# Altium PCB TIDA050024.PcbDoc (part 2 of 3)
Units mil, origin at the board's own origin, x right, y up, seen from the top; angles counter-clockwise.
Board outline 5500.19 x 3301.39 mil, 4 copper layers (Top Layer, Signal Layer 1, Signal Layer 2, Bottom Layer), stack 46.8 mil thick; 150 components, 88 nets, 368 pads, 374 vias.
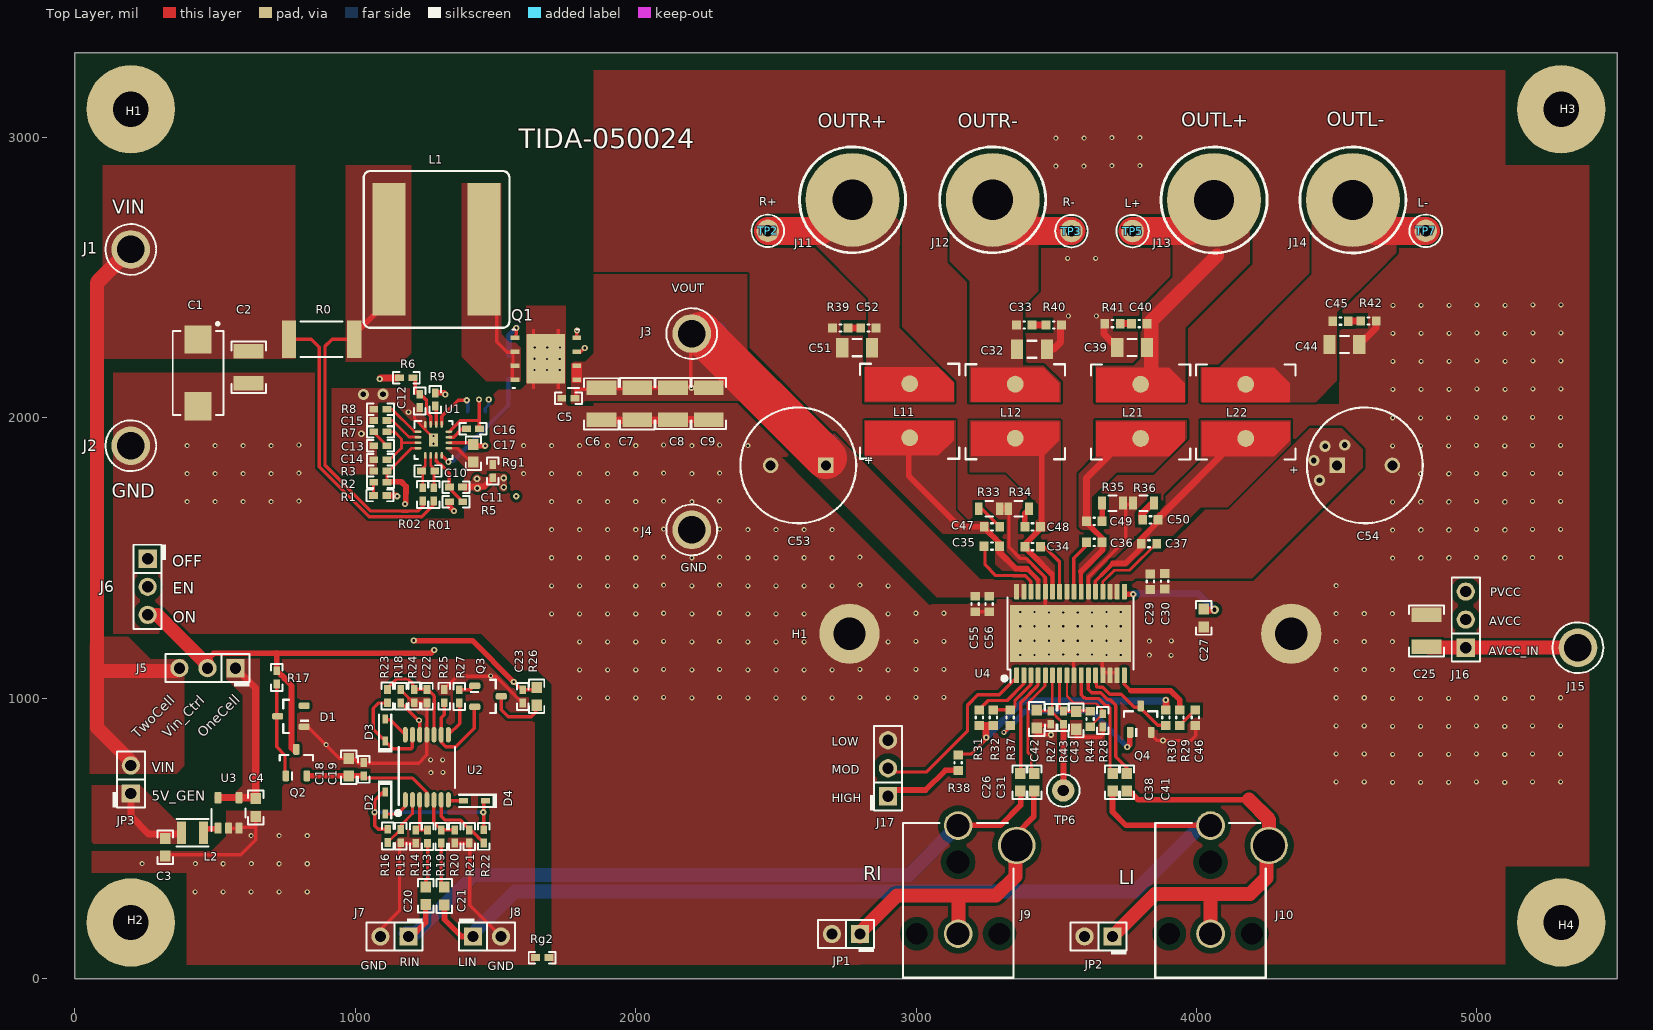
[diagram p0: Top Layer view]

## Part data (continued)
Q1: "MOSFET, 2-CH, N-CH, 30 V, 35 A, DQY0008A (LSON-CLIP-8)", Alternate Manufacturer=None, Manufacturer="Texas Instruments", Supplier Part Number 1=296-28327-6-ND, Value1="0.0088 ohm", Value2="5.9 nC", AEC Category=Q101, AEC Qualified=N, ChType=N, ComponentLink1Description="Datasheet link", ComponentLink1URL=http://www.ti.com/lit/ds/symlink/csd87351q5d.pdf, CompType=MOSFET, IdsMax_A=35, LatestRevisionDate=2017-06-26, LatestRevisionNote="Added parts.", MountType=SMT, PackageReference=DQY0008A, PartNumber=CSD87351Q5D, Published=2008-06-19, Publisher="Texas Instruments", QgTyp_nC=5.9, Rdson45_ohm=0.0088, RoHS=Y, SizeArea_mm2=30, SizeAreaWB_mm2=56, SizeX_mm=6, SizeY_mm=5, SizeZ_mm=1.6, Supplier 1=Digi-Key, Supplier 2=Mouser, Supplier Part Number 2=595-CSD87351Q5D, SymbolCreator=a0799628, SymbolVersion=2016-08-18, U/M=EA, VdsMax_V=30, Vgs_V=10
Q2 Q4: library part "BC850CLT1G, ON Semiconductor", "Transistor, NPN, 45 V, 0.1 A, SOT-23", Manufacturer="ON Semiconductor", Supplier Part Number 1=BC850CLT1GOSCT-ND, Value1="0.1 A", Value2=800, ComponentLink1Description="Datasheet link", ComponentLink1URL=http://www.onsemi.com/pub_link/Collateral/BC846ALT1-D.PDF, CompType=BJT, HfeMax=800, IcRated_A=0.1, LatestRevisionDate=2014-10-24, MountType=SMT, NPN=1, PackageReference=SOT-23, PartNumber=BC850CLT1G, PNP=0, Published=2008-07-31, Publisher="Texas Instruments", RoHS=Y, Supplier 1=Digi-Key, Supplier 2=Farnell, Supplier Part Number 2=1278476, SymbolVersion=2008-07-31, TaMax_C=150, TaMin_C=-55, U/M=EA, Vceo_V=45, Vcesat1_V=0.7
Q3: "MOSFET, N-CH, 50 V, 0.22 A, SOT-23", Alternate Manufacturer=None, Manufacturer="Fairchild Semiconductor", Supplier Part Number 1=BSS138CT-ND, Value1="6 ohm", Value2="1.7 nC", ChType=N, ComponentLink1Description="Datasheet link", ComponentLink1URL=http://www.fairchildsemi.com/ds/BS/BSS138.pdf, CompType=MOSFET, IdsMax_A=0.22, LatestRevisionDate=2015-06-17, LatestRevisionNote="Added parts.", MountType=SMT, PackageReference=SOT-23, PartNumber=BSS138, Published=2008-06-19, Publisher="Texas Instruments", QgTyp_nC=1.7, Rdson45_ohm=6, RoHS=Y, Supplier 1=Digi-Key, Supplier 2=Mouser, Supplier 3=Farnell, Supplier Part Number 2=512-BSS138, Supplier Part Number 3=9845330, SymbolVersion=2008-07-28, U/M=EA, VdsMax_V=50, Vgs_V=20
R0: "RES, 0.002, 1%, 2 W, 2512", Manufacturer="Stackpole Electronics Inc", Power_W=2, Supplier Part Number 1=CSNL2512FT2L00CT-ND, TempCo="50 ppm/C", Tolerance_%=1, Value1=1%, Value2=2W, Value_Code=2L000, ValueDisplayed=0.002, AEC Category=Q200, AEC Qualified=?, ComponentLink1Description="Datasheet link", ComponentLink1URL=http://www.seielect.com/catalog/SEI-CSNL.pdf, CompType=Resistor, LatestRevisionDate=2017-06-26, MountType=SMT, PackageReference=2512, PartNumber=CSNL2512FT2L00, Published=2008-06-26, Publisher="Texas Instruments", Res_ohm=0.002, RoHS=Y, SizeArea_mm2=20.16, SizeX_mm=6.3, SizeY_mm=3.2, SizeZ_mm=0.71, Supplier 1=Digi-Key, SymbolVersion=2009-05-29, Technology="Metal Element", U/M=EA, VDC_V=200
R01 R02 R5 R6: "RES, 10.0, 1%, 0.063 W, 0402", Manufacturer=Vishay-Dale, Power_W=0.063, Supplier Part Number 1=541-10.0LCT-ND, TempCo="100 ppm/C", Tolerance_%=1, Value1=1%, Value2=0.063W, Value_Code=10R0, ValueDisplayed=10.0, AEC Category=Q200, AEC Qualified=?, ComponentLink1Description="Datasheet link", ComponentLink1URL=http://www.vishay.com/docs/20035/dcrcwe3.pdf, CompType=Resistor, EIA_Code=E96, Green_EU RoHS="Passed with Exemption", Green_EU RoHS-2=Passed, Green_Lifecycle=Active, Green_REACh=Passed, LatestRevisionDate=2017-06-12, MountType=SMT, PackageReference=0402, PartNumber=CRCW040210R0FKED, Published=2008-06-26, Publisher="Texas Instruments", Res_ohm=10, RoHS=Y, SizeArea_mm2=0.5, SizeX_mm=1, SizeY_mm=0.5, SizeZ_mm=0.6, Supplier 1=Digi-Key, Supplier 2=Newark, Supplier 3=Mouser, Supplier Part Number 2=52K6600, Supplier Part Number 3=71-CRCW0402-10-E3, SymbolVersion=2009-05-29, Technology="Thick Film", U/M=EA, VDC_V=50
R1: "RES, 49.9, 1%, 0.063 W, 0402", Manufacturer=Vishay-Dale, Power_W=0.063, Supplier Part Number 1=541-49.9LCT-ND, TempCo="100 ppm/C", Tolerance_%=1, Value1=1%, Value2=0.063W, Value_Code=49R9, ValueDisplayed=49.9, AEC Category=Q200, AEC Qualified=?, ComponentLink1Description="Datasheet link", ComponentLink1URL=http://www.vishay.com/docs/20035/dcrcwe3.pdf, CompType=Resistor, EIA_Code=E96, Green_EU RoHS="Passed with Exemption", Green_EU RoHS-2=Passed, Green_Lifecycle=Active, Green_REACh=Passed, LatestRevisionDate=2017-06-12, MountType=SMT, PackageReference=0402, PartNumber=CRCW040249R9FKED, Published=2008-06-26, Publisher="Texas Instruments", Res_ohm=49.9, RoHS=Y, SizeArea_mm2=0.5, SizeX_mm=1, SizeY_mm=0.5, SizeZ_mm=0.6, Supplier 1=Digi-Key, Supplier 2=Newark, Supplier 3=Mouser, Supplier Part Number 2=52K7114, Supplier Part Number 3=71-CRCW0402-49.9-E3, SymbolVersion=2009-05-29, Technology="Thick Film", U/M=EA, VDC_V=50
R2: "RES, 200 k, 1%, 0.1 W, 0402", Manufacturer=Panasonic, Power_W=0.1, Supplier Part Number 1=P200KLCT-ND, TempCo="100 ppm/C", Tolerance_%=1, Value1=1%, Value2=0.1W, Value_Code=200k, AEC Category=Q200, AEC Qualified=?, ComponentLink1Description="Datasheet link", ComponentLink1URL=http://industrial.panasonic.com/www-data/pdf/AOA0000/AOA0000CE2.pdf, CompType=Resistor, EIA_Code=E96, Green_EU RoHS="Passed with Exemption", Green_EU RoHS-2=Incomplete, Green_Lifecycle=Active, Green_REACh=Passed, LatestRevisionDate=2017-06-12, MountType=SMT, PackageReference=0402, PartNumber=ERJ-2RKF2003X, Published=2008-06-26, Publisher="Texas Instruments", Res_ohm=200000, RoHS=Y, SizeArea_mm2=0.5, SizeX_mm=1, SizeY_mm=0.5, SizeZ_mm=0.6, Supplier 1=Digi-Key, Supplier 2=Newark, Supplier 3=Mouser, Supplier Part Number 2=73T6488, Supplier Part Number 3=667-ERJ-2RKF2003X, SymbolVersion=2009-05-29, Technology="Thick Film", U/M=EA, ValueDisplayed=200k, VDC_V=50
R3: "RES, 56.2 k, 1%, 0.063 W, 0402", Manufacturer=Vishay-Dale, Power_W=0.063, Supplier Part Number 1=541-56.2KLCT-ND, TempCo="100 ppm/C", Tolerance_%=1, Value1=1%, Value2=0.063W, Value_Code=56k2, ValueDisplayed=56.2k, AEC Category=Q200, AEC Qualified=?, ComponentLink1Description="Datasheet link", ComponentLink1URL=http://www.vishay.com/docs/20035/dcrcwe3.pdf, CompType=Resistor, EIA_Code=E96, Green_EU RoHS="Passed with Exemption", Green_EU RoHS-2=Passed, Green_Lifecycle=Active, Green_REACh=Passed, LatestRevisionDate=2017-06-12, MountType=SMT, PackageReference=0402, PartNumber=CRCW040256K2FKED, Published=2008-06-26, Publisher="Texas Instruments", Res_ohm=56200, RoHS=Y, SizeArea_mm2=0.5, SizeX_mm=1, SizeY_mm=0.5, SizeZ_mm=0.6, Supplier 1=Digi-Key, Supplier 2=Newark, Supplier 3=Mouser, Supplier Part Number 2=52K7159, Supplier Part Number 3=71-CRCW0402-56.2K-E3, SymbolVersion=2009-05-29, Technology="Thick Film", U/M=EA, VDC_V=50
R7: "RES, 7.50 k, 1%, 0.063 W, 0402", Manufacturer=Vishay-Dale, Power_W=0.063, Supplier Part Number 1=541-7.50KLCT-ND, TempCo="100 ppm/C", Tolerance_%=1, Value1=1%, Value2=0.063W, Value_Code=7k50, ValueDisplayed=7.50k, AEC Category=Q200, AEC Qualified=?, ComponentLink1Description="Datasheet link", ComponentLink1URL=http://www.vishay.com/docs/20035/dcrcwe3.pdf, CompType=Resistor, EIA_Code=E96, Green_EU RoHS="Passed with Exemption", Green_EU RoHS-2=Passed, Green_Lifecycle=Active, Green_REACh=Passed, LatestRevisionDate=2017-06-12, MountType=SMT, PackageReference=0402, PartNumber=CRCW04027K50FKED, Published=2008-06-26, Publisher="Texas Instruments", Res_ohm=7500, RoHS=Y, SizeArea_mm2=0.5, SizeX_mm=1, SizeY_mm=0.5, SizeZ_mm=0.6, Supplier 1=Digi-Key, Supplier 2=Newark, Supplier 3=Mouser, Supplier Part Number 2=52K7245, Supplier Part Number 3=71-CRCW0402-7.5K-E3, SymbolVersion=2009-05-29, Technology="Thick Film", U/M=EA, VDC_V=50
R8: "RES, 137 k, 1%, 0.063 W, 0402", Manufacturer=Vishay-Dale, Power_W=0.063, Supplier Part Number 1=541-137KLCT-ND, TempCo="100 ppm/C", Tolerance_%=1, Value1=1%, Value2=0.063W, Value_Code=137k, AEC Category=Q200, AEC Qualified=?, ComponentLink1Description="Datasheet link", ComponentLink1URL=http://www.vishay.com/docs/20035/dcrcwe3.pdf, CompType=Resistor, EIA_Code=E96, Green_EU RoHS="Passed with Exemption", Green_EU RoHS-2=Passed, Green_Lifecycle=Active, Green_REACh=Passed, LatestRevisionDate=2017-06-12, MountType=SMT, PackageReference=0402, PartNumber=CRCW0402137KFKED, Published=2008-06-26, Publisher="Texas Instruments", Res_ohm=137000, RoHS=Y, SizeArea_mm2=0.5, SizeX_mm=1, SizeY_mm=0.5, SizeZ_mm=0.6, Supplier 1=Digi-Key, Supplier 2=Newark, Supplier 3=Mouser, Supplier Part Number 2=52K6684, Supplier Part Number 3=71-CRCW0402-137K-E3, SymbolVersion=2009-05-29, Technology="Thick Film", U/M=EA, ValueDisplayed=137k, VDC_V=50
R9: "RES, 100 k, 1%, 0.063 W, 0402", Manufacturer=Vishay-Dale, Power_W=0.063, Supplier Part Number 1=541-100KLCT-ND, TempCo="100 ppm/C", Tolerance_%=1, Value1=1%, Value2=0.063W, Value_Code=100k, AEC Category=Q200, AEC Qualified=?, ComponentLink1Description="Datasheet link", ComponentLink1URL=http://www.vishay.com/docs/20035/dcrcwe3.pdf, CompType=Resistor, EIA_Code=E96, Green_EU RoHS="Passed with Exemption", Green_EU RoHS-2=Passed, Green_Lifecycle=Active, Green_REACh=Passed, LatestRevisionDate=2017-06-12, MountType=SMT, PackageReference=0402, PartNumber=CRCW0402100KFKED, Published=2008-06-26, Publisher="Texas Instruments", Res_ohm=100000, RoHS=Y, SizeArea_mm2=0.5, SizeX_mm=1, SizeY_mm=0.5, SizeZ_mm=0.6, Supplier 1=Digi-Key, Supplier 2=Newark, Supplier 3=Mouser, Supplier Part Number 2=52K6607, Supplier Part Number 3=71-CRCW0402-100K-E3, SymbolVersion=2009-05-29, Technology="Thick Film", U/M=EA, ValueDisplayed=100k, VDC_V=50
R10 R11: library part CMP-0081973-1, "RES, 0, 0%, 0.25 W, AEC-Q200 Grade 0, 0603", Manufacturer=Vishay-Dale, Power_W=250mW, Supplier Part Number 1=541-2779-1-ND, Tolerance_%=0%, Value2=0.25W, Value_Code=0, AEC Category=Q200, AEC Grade=0, AEC Qualified=Y, ComponentLink1Description="Datasheet link", ComponentLink1URL=http://www.vishay.com/docs/20065/rcse3.pdf, CompType=Resistor, MountType=SMT, PackageReference=0603, PartNumber=RCS06030000Z0EA, Res_ohm=0, RoHS=Y, SizeArea_mm2=1.28, SizeAreaWB_mm2=4.68, SizeX_mm=1.6, SizeY_mm=0.8, SizeZ_mm=1, Supplier 1=Digi-Key, Supplier 2=Mouser, Supplier Part Number 2=71-RCS06030000Z0EA, Technology="Thick Film", Value1=0%, ValueDisplayed=0
R13 R19 R27 Rg1 Rg2: "RES, 0, 5%, 0.063 W, 0402", Manufacturer=Vishay-Dale, Power_W=0.063, Supplier Part Number 1=541-0.0JCT-ND, TempCo="200 ppm/C", Tolerance_%=5, Value1=5%, Value2=0.063W, Value_Code=0000, ValueDisplayed=0, ComponentLink1Description="Datasheet link", ComponentLink1URL=http://www.vishay.com/docs/20035/dcrcwe3.pdf, CompType=Resistor, EIA_Code=E24, MountType=SMT, PackageReference=0402, PartNumber=CRCW04020000Z0ED, Published=2008-06-26, Publisher="Texas Instruments", Res_ohm=0, RoHS=Y, Supplier 1=Digi-Key, SymbolVersion=2009-05-29, Technology="Thick Film", U/M=EA, VDC_V=50
  R13 R19 R27: LatestRevisionDate=2015-06-17, Supplier 2=Mouser, Supplier 3=Farnell, Supplier Part Number 2=71-CRCW0402-0-E3, Supplier Part Number 3=1469661
  Rg1 Rg2: AEC Category=Q200, AEC Qualified=?, Green_EU RoHS="Passed with Exemption", Green_EU RoHS-2=Passed, Green_Lifecycle=Active, Green_REACh=Passed, LatestRevisionDate=2017-06-12, SizeArea_mm2=0.5, SizeX_mm=1, SizeY_mm=0.5, SizeZ_mm=0.6, Supplier 2=Newark, Supplier 3=Mouser, Supplier Part Number 2=52K6543, Supplier Part Number 3=71-CRCW0402-0-E3
R14 R18 R20: "RES, 100 k, 0.5%, 0.063 W, 0402", Manufacturer=Vishay-Dale, Power_W=0.063, Supplier Part Number 1=541-100KAVCT-ND, TempCo="50 ppm/C", Tolerance_%=0.5, Value1=0.5%, Value2=0.063W, Value_Code=100k, ComponentLink1Description="Datasheet link", ComponentLink1URL=http://www.vishay.com/docs/20036/dcrcwpe3.pdf, CompType=Resistor, EIA_Code=E192, LatestRevisionDate=2015-06-17, MountType=SMT, PackageReference=0402, PartNumber=CRCW0402100KDHEDP, Published=2008-06-26, Publisher="Texas Instruments", Res_ohm=100000, RoHS=Y, Supplier 1=Digi-Key, SymbolVersion=2009-05-29, Technology="Thick Film", U/M=EA, ValueDisplayed=100k, VDC_V=50
R15 R16 R21 R22: "RES, 10.2 k, 1%, 0.063 W, 0402", Manufacturer=Vishay-Dale, Power_W=0.063, Supplier Part Number 1=541-10.2KLCT-ND, TempCo="100 ppm/C", Tolerance_%=1, Value1=1%, Value2=0.063W, Value_Code=10k2, ValueDisplayed=10.2k, ComponentLink1Description="Datasheet link", ComponentLink1URL=http://www.vishay.com/docs/20035/dcrcwe3.pdf, CompType=Resistor, EIA_Code=E96, LatestRevisionDate=2015-06-17, MountType=SMT, PackageReference=0402, PartNumber=CRCW040210K2FKED, Published=2008-06-26, Publisher="Texas Instruments", Res_ohm=10200, RoHS=Y, Supplier 1=Digi-Key, Supplier 2=Mouser, Supplier 3=Farnell, Supplier Part Number 2=71-CRCW0402-10.2K-E3, Supplier Part Number 3=1158295, SymbolVersion=2009-05-29, Technology="Thick Film", U/M=EA, VDC_V=50
R17: "RES, 3.01 k, 1%, 0.063 W, 0402", Manufacturer=Vishay-Dale, Power_W=0.063, Supplier Part Number 1=541-3.01KLCT-ND, TempCo="100 ppm/C", Tolerance_%=1, Value1=1%, Value2=0.063W, Value_Code=3k01, ValueDisplayed=3.01k, AEC Category=Q200, AEC Qualified=?, ComponentLink1Description="Datasheet link", ComponentLink1URL=http://www.vishay.com/docs/20035/dcrcwe3.pdf, CompType=Resistor, EIA_Code=E96, LatestRevisionDate=2017-01-28, MountType=SMT, PackageReference=0402, PartNumber=CRCW04023K01FKED, Published=2008-06-26, Publisher="Texas Instruments", Res_ohm=3010, RoHS=Y, SizeArea_mm2=0.5, SizeX_mm=1, SizeY_mm=0.5, SizeZ_mm=0.6, Supplier 1=Digi-Key, Supplier 2=Newark, Supplier 3=Mouser, Supplier Part Number 2=52K6935, Supplier Part Number 3=71-CRCW0402-3.01K-E3, SymbolVersion=2009-05-29, Technology="Thick Film", U/M=EA, VDC_V=50
R23: "RES, 12.1, 1%, 0.063 W, 0402", Manufacturer=Vishay-Dale, Power_W=0.063, Supplier Part Number 1=541-12.1LCT-ND, TempCo="100 ppm/C", Tolerance_%=1, Value1=1%, Value2=0.063W, Value_Code=12R1, ValueDisplayed=12.1, ComponentLink1Description="Datasheet link", ComponentLink1URL=http://www.vishay.com/docs/20035/dcrcwe3.pdf, CompType=Resistor, EIA_Code=E96, LatestRevisionDate=2015-06-17, MountType=SMT, PackageReference=0402, PartNumber=CRCW040212R1FKED, Published=2008-06-26, Publisher="Texas Instruments", Res_ohm=12.1, RoHS=Y, Supplier 1=Digi-Key, Supplier 2=Mouser, Supplier 3=Farnell, Supplier Part Number 2=71-CRCW0402-12.1-E3, Supplier Part Number 3=1150810, SymbolVersion=2009-05-29, Technology="Thick Film", U/M=EA, VDC_V=50
R24: "RES, 1.00 M, 1%, 0.1 W, 0402", Manufacturer=Panasonic, Power_W=0.1, Supplier Part Number 1=P1.00MLCT-ND, TempCo="100 ppm/C", Tolerance_%=1, Value1=1%, Value2=0.1W, Value_Code=1M00, ValueDisplayed=1.00M, ComponentLink1Description="Datasheet link", ComponentLink1URL=http://industrial.panasonic.com/www-data/pdf/AOA0000/AOA0000CE2.pdf, CompType=Resistor, EIA_Code=E96, LatestRevisionDate=2015-06-17, MountType=SMT, PackageReference=0402, PartNumber=ERJ-2RKF1004X, Published=2008-06-26, Publisher="Texas Instruments", Res_ohm=1000000, RoHS=Y, Supplier 1=Digi-Key, Supplier 2=Mouser, Supplier 3=Farnell, Supplier Part Number 2=667-ERJ-2RKF1004X, Supplier Part Number 3=2304462, SymbolVersion=2009-05-29, Technology="Thick Film", U/M=EA, VDC_V=50
R25: "RES, 18.7 k, 1%, 0.063 W, 0402", Manufacturer=Vishay-Dale, Power_W=0.063, Supplier Part Number 1=541-18.7KLCT-ND, TempCo="100 ppm/C", Tolerance_%=1, Value1=1%, Value2=0.063W, Value_Code=18k7, ValueDisplayed=18.7k, AEC Category=Q200, AEC Qualified=?, ComponentLink1Description="Datasheet link", ComponentLink1URL=http://www.vishay.com/docs/20035/dcrcwe3.pdf, CompType=Resistor, EIA_Code=E96, Green_EU RoHS="Passed with Exemption", Green_EU RoHS-2=Passed, Green_Lifecycle=Active, Green_REACh=Passed, LatestRevisionDate=2017-06-12, MountType=SMT, PackageReference=0402, PartNumber=CRCW040218K7FKED, Published=2008-06-26, Publisher="Texas Instruments", Res_ohm=18700, RoHS=Y, SizeArea_mm2=0.5, SizeX_mm=1, SizeY_mm=0.5, SizeZ_mm=0.6, Supplier 1=Digi-Key, Supplier 2=Newark, Supplier 3=Mouser, Supplier Part Number 2=52K6759, Supplier Part Number 3=71-CRCW0402-18.7K-E3, SymbolVersion=2009-05-29, Technology="Thick Film", U/M=EA, VDC_V=50
R26: "RES, 10.5 k, 1%, 0.1 W, 0603", Manufacturer=Vishay-Dale, Power_W=0.1, Supplier Part Number 1=541-10.5KHCT-ND, TempCo="100 ppm/C", Tolerance_%=1, Value1=1%, Value2=0.1W, Value_Code=10k5, ValueDisplayed=10.5k, AEC Category=Q200, AEC Qualified=?, ComponentLink1Description="Datasheet link", ComponentLink1URL=http://www.vishay.com/docs/20035/dcrcwe3.pdf, CompType=Resistor, EIA_Code=E96, Green_EU RoHS="Passed with Exemption", Green_EU RoHS-2=Passed, Green_Lifecycle=Active, Green_REACh=Passed, LatestRevisionDate=2017-06-13, MountType=SMT, PackageReference=0603, PartNumber=CRCW060310K5FKEA, Published=2008-06-26, Publisher="Texas Instruments", Res_ohm=10500, RoHS=Y, SizeArea_mm2=1.28, SizeX_mm=1.6, SizeY_mm=0.8, SizeZ_mm=1, Supplier 1=Digi-Key, Supplier 2=Newark, Supplier 3=Mouser, Supplier Part Number 2=52K8068, Supplier Part Number 3=71-CRCW0603-10.5K-E3, SymbolVersion=2009-05-29, Technology="Thick Film", U/M=EA, VDC_V=75
R27: "RES, 20.5 k, 1%, 0.063 W, 0402", Manufacturer=Vishay-Dale, Power_W=0.063, Supplier Part Number 1=541-20.5KLCT-ND, TempCo="100 ppm/C", Tolerance_%=1, Value1=1%, Value2=0.063W, Value_Code=20k5, ValueDisplayed=20.5k, AEC Category=Q200, AEC Qualified=?, ComponentLink1Description="Datasheet link", ComponentLink1URL=http://www.vishay.com/docs/20035/dcrcwe3.pdf, CompType=Resistor, EIA_Code=E96, LatestRevisionDate=2017-04-13, MountType=SMT, PackageReference=0402, PartNumber=CRCW040220K5FKED, Published=2008-06-26, Publisher="Texas Instruments", Res_ohm=20500, RoHS=Y, SizeArea_mm2=0.5, SizeX_mm=1, SizeY_mm=0.5, SizeZ_mm=0.6, Supplier 1=Digi-Key, Supplier 2=Newark, Supplier 3=Mouser, Supplier Part Number 2=52K6819, Supplier Part Number 3=71-CRCW0402-20.5K-E3, SymbolVersion=2009-05-29, Technology="Thick Film", U/M=EA, VDC_V=50
R28: "RES, 39 k, 5%, 0.063 W, 0402", Manufacturer=Vishay-Dale, Power_W=0.063, Supplier Part Number 1=541-39KJCT-ND, TempCo="200 ppm/C", Tolerance_%=5, Value1=5%, Value2=0.063W, Value_Code=39k0, ValueDisplayed=39k, AEC Category=Q200, AEC Qualified=?, ComponentLink1Description="Datasheet link", ComponentLink1URL=http://www.vishay.com/docs/20035/dcrcwe3.pdf, CompType=Resistor, EIA_Code=E24, LatestRevisionDate=2017-06-12, MountType=SMT, PackageReference=0402, PartNumber=CRCW040239K0JNED, Published=2008-06-26, Publisher="Texas Instruments", Res_ohm=39000, RoHS=Y, SizeArea_mm2=0.5, SizeX_mm=1, SizeY_mm=0.5, SizeZ_mm=0.6, Supplier 1=Digi-Key, Supplier 2=Newark, Supplier 3=Mouser, Supplier Part Number 2=59M6729, Supplier Part Number 3=71-CRCW0402J-39K-E3, SymbolVersion=2009-05-29, Technology="Thick Film", U/M=EA, VDC_V=50
R29: "RES, 4.70 k, 0.1%, 0.1 W, 0603", Manufacturer="Susumu Co Ltd", Power_W=0.1, Supplier Part Number 1=RG16P4.7KBCT-ND, TempCo="25 ppm/C", Value1=0.1%, Value2=0.1W, Value_Code=4k70, ValueDisplayed=4.70k, AEC Category=Q200, AEC Qualified=?, ComponentLink1Description="Datasheet link", ComponentLink1URL=http://www.susumu.co.jp/english/pdf/products-j01-01.pdf, CompType=Resistor, EIA_Code=E192, LatestRevisionDate=2015-12-05, MountType=SMT, PackageReference=0603, PartNumber=RG1608P-472-B-T5, Published=2008-06-26, Publisher="Texas Instruments", Res_ohm=4700, RoHS=Y, Supplier 1=Digi-Key, Supplier 2=Mouser, Supplier 3=Farnell, Supplier Part Number 2=754-RG1608P-472-B-T5, Supplier Part Number 3=1797194, SymbolVersion=2009-05-29, Technology="Metal Film", Tolerance_%=0.1, U/M=EA, VDC_V=75
R30 R32 R37 R38 R44: "RES, 100k ohm, 1%, 0.1W, 0603", Manufacturer="Yageo America", Power_W=0.1, Supplier Part Number 1=311-100KHRCT-ND, TempCo="200 ppm/C", Tolerance_%=1, Value1=1%, Value2=0.1W, Value_Code=100k, ComponentLink1Description="Datasheet link", ComponentLink1URL=http://www.yageo.com/pdf/Pu-RC0603_51_PbFree_L_2.pdf, CompType=Resistor, EIA_Code=E96, LatestRevisionDate=2014-05-20, MountType=SMT, PackageReference=0603, PartNumber=RC0603FR-07100KL, Published=2008-06-26, Publisher="Texas Instruments", Res_ohm=100000, RoHS=Y, Supplier 1=Digi-Key, Supplier 2=Mouser, Supplier 3=Farnell, Supplier Part Number 2=603-RC0603FR-07100KL, Supplier Part Number 3=9238727, SymbolVersion=2009-05-29, Technology="Thick Film", U/M=EA, VDC_V=150
R31: "RES, 499 k, 1%, 0.1 W, 0603", Manufacturer="Yageo America", Power_W=0.1, Supplier Part Number 1=311-499KHRCT-ND, TempCo="200 ppm/C", Tolerance_%=1, Value1=1%, Value2=0.1W, Value_Code=499k, AEC Category=Q200, AEC Qualified=?, ComponentLink1Description="Datasheet link", ComponentLink1URL=http://www.yageo.com/pdf/Pu-RC0603_51_PbFree_L_2.pdf, CompType=Resistor, EIA_Code=E96, LatestRevisionDate=2016-02-27, MountType=SMT, PackageReference=0603, PartNumber=RC0603FR-07499KL, Published=2008-06-26, Publisher="Texas Instruments", Res_ohm=499000, RoHS=Y, Supplier 1=Digi-Key, Supplier 2=Mouser, Supplier 3=Farnell, Supplier Part Number 2=603-RC0603FR-07499KL, Supplier Part Number 3=1799347, SymbolVersion=2009-05-29, Technology="Thick Film", U/M=EA, ValueDisplayed=499k, VDC_V=150
R33 R34 R35 R36: "RES, 10, 5%, 0.125 W, 0805", Manufacturer=Vishay-Dale, Power_W=0.125, Supplier Part Number 1=541-10ACT-ND, TempCo="200 ppm/C", Tolerance_%=5, Value1=5%, Value2=0.125W, Value_Code=10R0, ValueDisplayed=10, ClassName="Full Flood", ComponentLink1Description="Datasheet link", ComponentLink1URL=http://www.vishay.com/docs/20035/dcrcwe3.pdf, CompType=Resistor, EIA_Code=E24, LatestRevisionDate=2014-12-17, MountType=SMT, PackageReference=0805, PartNumber=CRCW080510R0JNEA, Published=2008-06-26, Publisher="Texas Instruments", Res_ohm=10, RoHS=Y, Supplier 1=Digi-Key, Supplier 2=Mouser, Supplier 3=Farnell, Supplier Part Number 2=71-CRCW080510R0JNEA, Supplier Part Number 3=1514808, SymbolVersion=2009-05-29, Technology="Thick Film", U/M=EA, VDC_V=150
R39 R40 R41 R42: "RES, 3.3, 5%, 0.1 W, 0603", Manufacturer=Vishay-Dale, Power_W=0.1, Supplier Part Number 1=541-3.3GCT-ND, TempCo="200 ppm/C", Tolerance_%=5, Value1=5%, Value2=0.1W, Value_Code=3R30, ValueDisplayed=3.3, ComponentLink1Description="Datasheet link", ComponentLink1URL=http://www.vishay.com/docs/20035/dcrcwe3.pdf, CompType=Resistor, EIA_Code=E24, LatestRevisionDate=2014-10-21, MountType=SMT, PackageReference=0603, PartNumber=CRCW06033R30JNEA, Published=2008-06-26, Publisher="Texas Instruments", Res_ohm=3.3, RoHS=Y, Supplier 1=Digi-Key, Supplier 2=Mouser, Supplier 3=Farnell, Supplier Part Number 2=71-CRCW0603J-3.3-E3, Supplier Part Number 3=1514753, SymbolVersion=2009-05-29, Technology="Thick Film", U/M=EA, VDC_V=75
R43: "RES, 0, 5%, 0.063 W, 0402", Manufacturer=Panasonic, Power_W=0.063, Supplier Part Number 1=P0.0JCT-ND, TempCo="600 ppm/C", Tolerance_%=5, Value1=5%, Value2=0.063W, Value_Code=0000, ValueDisplayed=0, AEC Category=Q200, AEC Qualified=?, ComponentLink1Description="Datasheet link", ComponentLink1URL=http://www.panasonic.com/industrial/components/pdf/AOA0000CE1.pdf, CompType=Resistor, EIA_Code=E24, Green_EU RoHS="Passed with Exemption", Green_EU RoHS-2=Passed, Green_Lifecycle=Active, Green_REACh=Passed, LatestRevisionDate=2017-06-12, MountType=SMT, PackageReference=0402, PartNumber=ERJ-2GE0R00X, Published=2008-06-26, Publisher="Texas Instruments", Res_ohm=0, RoHS=Y, SizeArea_mm2=0.5, SizeX_mm=1, SizeY_mm=0.5, SizeZ_mm=0.6, Supplier 1=Digi-Key, Supplier 2=Newark, Supplier 3=Mouser, Supplier Part Number 2=65T8307, Supplier Part Number 3=667-ERJ-2GE0R00X, SymbolVersion=2009-05-29, Technology="Thick Film", U/M=EA, VDC_V=50
TP2 TP3 TP5 TP6 TP7: library part 5003, "Test Point, Miniature, Orange, TH", Manufacturer=Keystone, Supplier Part Number 1=36-5003-ND, ComponentLink1Description="Datasheet Link", ComponentLink1URL=http://www.keyelco.com/userAssets/file/M60-2p60.pdf, CompType="Test Point Loop", LatestRevisionDate=2015-08-25, MountType=TH, PackageReference="Orange Miniature Testpoint", PartNumber=5003, Publisher="Texas Instruments", RoHS=Y, Supplier 1=Digi-Key, SymbolVersion=2008-04-04, U/M=EA
U1: library part CMP-0067158-1, "Low Iq, Synchronous Boost Controller with Wide Input Voltage and 5.5V Gate Drive for Low Qg  NexFETs, RTE0016E (WQFN-16)", Alternate Manufacturer="Texas Instruments", Alternate PartNumber=TPS43061RTET, ComponentLink1Description="Datasheet Link", ComponentLink1URL=http://www.ti.com/lit/ds/symlink/tps43061.pdf, CompType=IC, Footprint Path 6=C:\AltiumLibraries\Footprints\TI\.PcbLib, Green_EU RoHS=Passed, Green_EU RoHS-2=Passed, Green_Lifecycle=Active, Green_REACh=Passed, LatestRevisionDate=2017-06-09, Manufacturer="Texas Instruments", MountType=SMT, PackageDescription=WQFN-16, PackageReference=RTE0016E, PartNumber=TPS43061RTER, Publisher="Texas Instruments", RoHS=Y, SizeArea_mm2=9.0, SizeAreaWB_mm2=16.0, SizeX_mm=3.0, SizeY_mm=3.0, SizeZ_mm=0.8, U/M=EA
U2: "Low-Cost, Low Noise, 5.5 MHz CMOS Operational Amplifier, 2.2 to 5.5 V, -40 to 125 degC, 14-pin SOP (PW0014A), Green (RoHS & no Sb/Br)", Alternate Manufacturer=None, Alternate PartNumber=Equivalent, Manufacturer="Texas Instruments", Supplier Part Number 1=296-28046-5-ND, Total Supply Voltage(Max)(+5V is 5, +/-5V is 10)=5.5, Total Supply Voltage(Min)(+5V is 5, +/-5V is 10)=2.2, CMRR(Min)(dB)=70, Code_JEDEC=MO-153, ComponentLink1Description="Manufacturer URL", ComponentLink1URL=http://www.ti.com/, ComponentLink2Description=Datasheet, ComponentLink2URL=http://www.ti.com/general/docs/lit/getliterature.tsp?genericPartNumber=OPA4377&fileType=pdf, ComponentLink3Description="Package Specification", ComponentLink3URL=http://www.ti.com/litv/pdf/mpds360, DatasheetVersion=SBOS504B, Eco-Plan="Green (RoHS & no Sb/Br)", IIB(Max)(pA)=10, Iq per channel(Max)(mA)=1.05, MountType=SMT, Number of Channels=4, Offset Drift(Typ)(uV/C)=0.32, PackageDescription="14-Pin Plastic Small Outline, Body 5 x 4.4 mm, Pitch 0.65 mm", PackageReference=PW0014A, PackageVersion="4040064-3/G, 02/2011", PartNumber=OPA4377AIPW, Slew Rate(Typ)(V/us)=2, Sub Family="Low Input Bias Current Amp (<=10pA), Low Noise Amp (<=10nV/rtHz), Low Supply Voltage Amplifier (<=2.7V), Precision Amplifier", Supplier 1=Digi-Key, Supplier 2=Newark, Supplier 3=Mouser, Supplier Part Number 2=21T3848, Supplier Part Number 3=595-OPA4377AIPW, Vio (25C)(Max)(mV)=1, Vn at 1kHz(Typ)(nV/rtHz)=7.5
U3: library part CMP-0079087-1, "6.5-µA Quiescent Current, 1.8-A Switch Current Boost Converter, DBV0005A (SOT-23-5)", Alternate Manufacturer="Texas Instruments", Alternate PartNumber=TPS613222ADBVT, AEC Category=Q200, AEC Qualified=N, ComponentLink1Description="Datasheet Link", ComponentLink1URL=http://www.ti.com/lit/ds/symlink/tps61322.pdf, ComponentLink2Description="Product Folder", ComponentLink2URL=http://www.ti.com/product/tps61322, CompType=IC, Manufacturer="Texas Instruments", MountType=SMT, PackageDescription=SOT-23-5, PackageReference=DBV0005A, PartNumber=TPS613222ADBVR, SizeArea_mm2=8.12, SizeAreaWB_mm2=14.82, SizeX_mm=2.8, SizeY_mm=2.9, SizeZ_mm=1.45
U4: "2x30-W Class-D Amplifier With Low Idle Power Dissipation, DAP0032A (TSSOP-32)", Alternate Manufacturer="Texas Instruments", Alternate PartNumber=TPA3128D2DAP, ComponentLink1Description="Datasheet Link", ComponentLink1URL=http://www.ti.com/lit/ds/symlink/tpa3128d2.pdf, CompType=IC, Green_EU RoHS=Passed, Green_EU RoHS-2=Passed, Green_Lifecycle=Active, Green_REACh=Passed, LatestRevisionDate=2017-05-08, Manufacturer="Texas Instruments", MountType=SMT, PackageDescription=TSSOP-32, PackageReference=DAP0032A, PartNumber=TPA3128D2DAPR, Publisher="Texas Instruments", RoHS=Y, SizeArea_mm2=89.1, SizeAreaWB_mm2=131.3, SizeX_mm=8.1, SizeY_mm=11, SizeZ_mm=1.2, SymbolCreator=Altium, SymbolVersion=2016-02-26, U/M=EA

## Via types
v1: diameter 18, hole 9, Top Layer to Bottom Layer, 291 vias
v2: diameter 22, hole 10, Top Layer to Bottom Layer, 26 vias
v3: diameter 19.68, hole 7.87, Top Layer to Bottom Layer, 18 vias
v4: diameter 19.68, hole 7.87, Top Layer to Bottom Layer, tented both sides, 16 vias
v5: diameter 18, hole 8, Top Layer to Bottom Layer, 9 vias
v6: diameter 40, hole 20, Top Layer to Bottom Layer, 6 vias
v7: diameter 24, hole 12, Top Layer to Bottom Layer, 5 vias
v8: diameter 20, hole 10, Top Layer to Bottom Layer, 2 vias
v9: diameter 30, hole 15, Top Layer to Bottom Layer, 1 vias

## Nets (pads, with @x,y where several pads share a name; then routed paths per layer and width w, separated by ;. In a path a pad name is that pad's centre, name@x,y a point inside that pad or via, vN(x,y) a via of type N, cw(c..) or ccw(c..) an arc to the next point about the centre after c; other vN are vias at no path point)
5V: C4.1 J5.1 U3.4 U3.5 | length 635.4
  Top Layer w25: U3.5@510.86,644.91 U3.4@585.66,644.91 642.89,644.91 C4.1@643.65,645.67 ; J5.1@571.88,1108.92 J5.1@576.68,1104.12 ; J5.1@574.71,1109.13 576.68,1107.15 J5.1@576.68,1104.12 ; C4.1@644.85,642.7 644.85,1035.95 J5.1@576.68,1104.12
\FAULT: R32.2 R37.1 U4.3 | length 231.6
  Top Layer w12: R32.2@3271.55,954.96 3274.72,958.13 R37.1@3340.46,958.13 ; R37.1@3340.19,957.86 R37.1@3340.46,958.13 ; R37.1@3340.57,958.13 R37.1@3340.46,958.13 ; U4.3@3409,1090.66 3409,1047.89 3352.57,991.46 3352.57,970.24 R37.1@3340.46,958.13
\SD: R31.1 U4.2 | length 239
  Top Layer w12: R31.1@3222.89,957.86 3256.73,991.7 3324.44,991.7 3383.4,1050.67 U4.2@3383.4,1090.66
AGND: C3.2 C4.2 C11.2 C12.2 C13.2 C14.2 C15.2 C18.2 C19.2 C22.2 C23.2 D1.1 J6.1 J7.2 J8.2 R3.1 R8.1 R14.1 R15.1 R18.1 R20.1 R21.1 R24.1 R25.1 Rg1.1 Rg2.1 U1.16 U1.17 U2.11 U3.2 U3.3 | length 3386.2
  Top Layer w10: R18.1@1161.65,1029.54 1161.65,1029.22 1162.61,1029.22 1206.6,985.22 1252.51,985.22 1253.47,986.18 1255.49,984.16 U2.11@1255.49,869.61 ; 1211.03,2003.75 1211.03,1996.72 1249.33,1958.43 ; U1.16@1249.33,1979.15 1249.33,1958.43 ; U1.17@1279.16,1920.84 1279.16,1928.59 1249.33,1958.43 ; C11.2@1383.32,1751.56 C11.2@1386.68,1751.56
  Top Layer w12: C3.2@326.55,441.33 591.85,441.33 ; U3.2@548.26,536.65 U3.3@585.66,536.65 590.14,536.65 593.09,539.6 645.12,539.6 645.39,539.86 ; 591.97,441.84 645.89,495.76 C4.2@645.89,580.65 ; D1.1@818.11,897.94 830.74,897.94 943.78,784.9 994.06,784.9 1010.53,768.43 1226.21,768.43 1255.59,797.81 U2.11@1255.59,875.63 ; R8.1@1061.38,2031.75 R8.1@1061.77,2032.15 ; R3.1@1064.75,1812.48 R3.1@1067.98,1809.25 ; C14.2@1064.75,1852.4 C14.2@1066.38,1854.03 ; J7.2@1090,150 1090,174.39 1157.93,242.32 R15.1@1157.93,482.09 ; R15.1@1162.1,482.7 R14.1@1215.81,482.7 ; 1226.21,768.74 1254.96,797.5 U2.11@1254.96,870.41 ; R25.1@1316.45,1031.08 1363.09,1077.72 1501.67,1077.72 1579.26,1000.13 1579.37,1000.13 C23.2@1596.87,982.64 ; R20.1@1355.33,483.2 1406.77,483.2 1407.43,483.86 R21.1@1407.43,481.56 ; R21.1@1405.82,483.17 R21.1@1407.43,481.56 ; J8.2@1520,150 1407.98,262.02 1407.98,481.01 R21.1@1407.43,481.56
  Top Layer w20: C11.2@1383.26,1755.01 1395.09,1755.01 1395.39,1754.71 1459.82,1754.71 Rg1.1@1490.91,1785.8
  Signal Layer 1 w50: J6.1@260.09,1497.08 747.04,1497.08
  other v1: 428.97,309.5 528.97,309.5 628.97,309.5 728.97,309.5 828.97,309.5 528.97,409.5 728.97,409.5 828.97,409.5 240,410 430,410 630,410 628.97,509.5 728.97,509.5 828.97,509.5 1270.19,734.86 1312.98,735.1 1268.94,779.86 1311.73,780.09 896.14,834.44 1483.05,1079.14
  other v3: 1279.16,1907.06 1279.16,1934.62
  other v6: 1029.36,2083.26 1099.05,2083.33
  other v7: 1435.85,1748.27 1529.45,1752.05 1434.45,1782.05 1530,1785 1022.13,1942.46
  other v8: 1190,2020